# Altium PCB XT long bus (13.3 X 4.2 inches).PCBDOC
Units mil, origin at the board's own origin, x right, y up, seen from the top; angles counter-clockwise.
Board outline 13300 x 4200 mil, 10 copper layers (TopLayer, MidLayer1, MidLayer2, MidLayer3, MidLayer4, MidLayer5, MidLayer6, MidLayer7, MidLayer8, BottomLayer); 1 components, 0 nets, 67 pads, 0 vias.
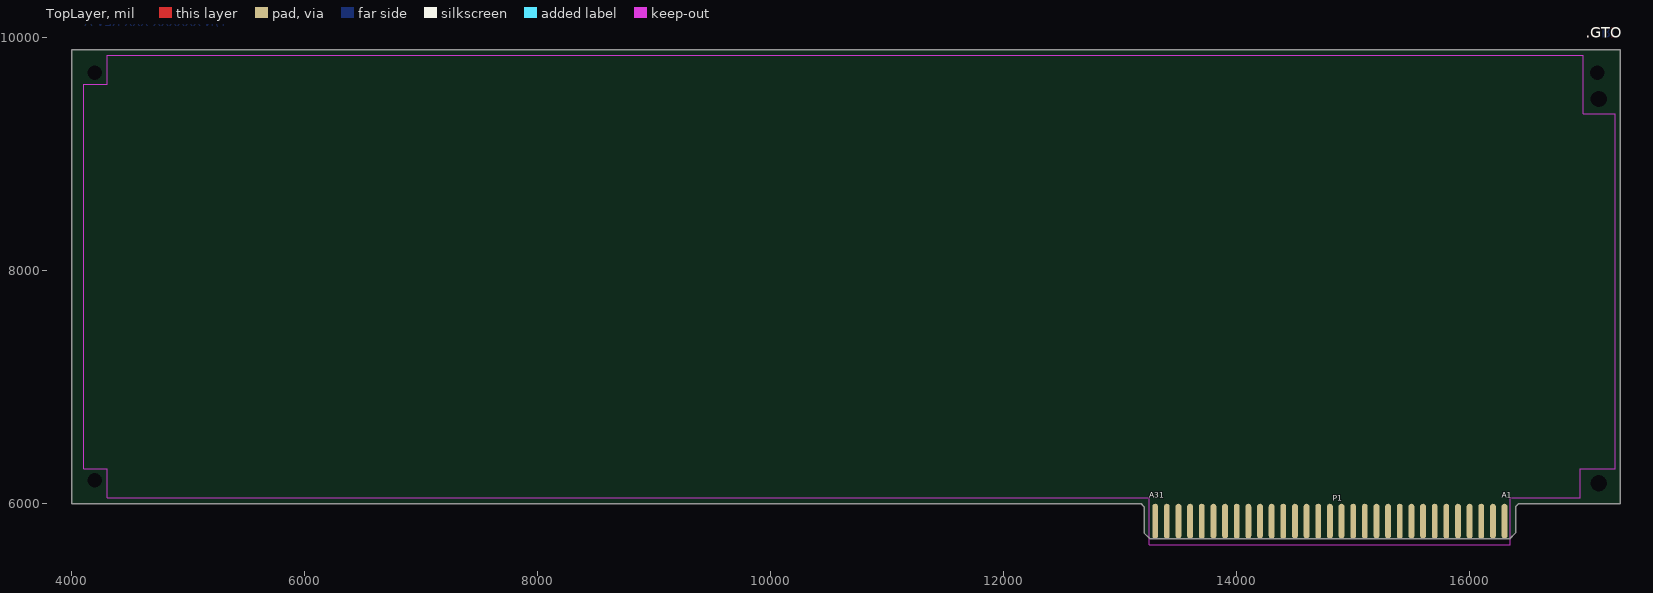
[diagram p0: TopLayer view]
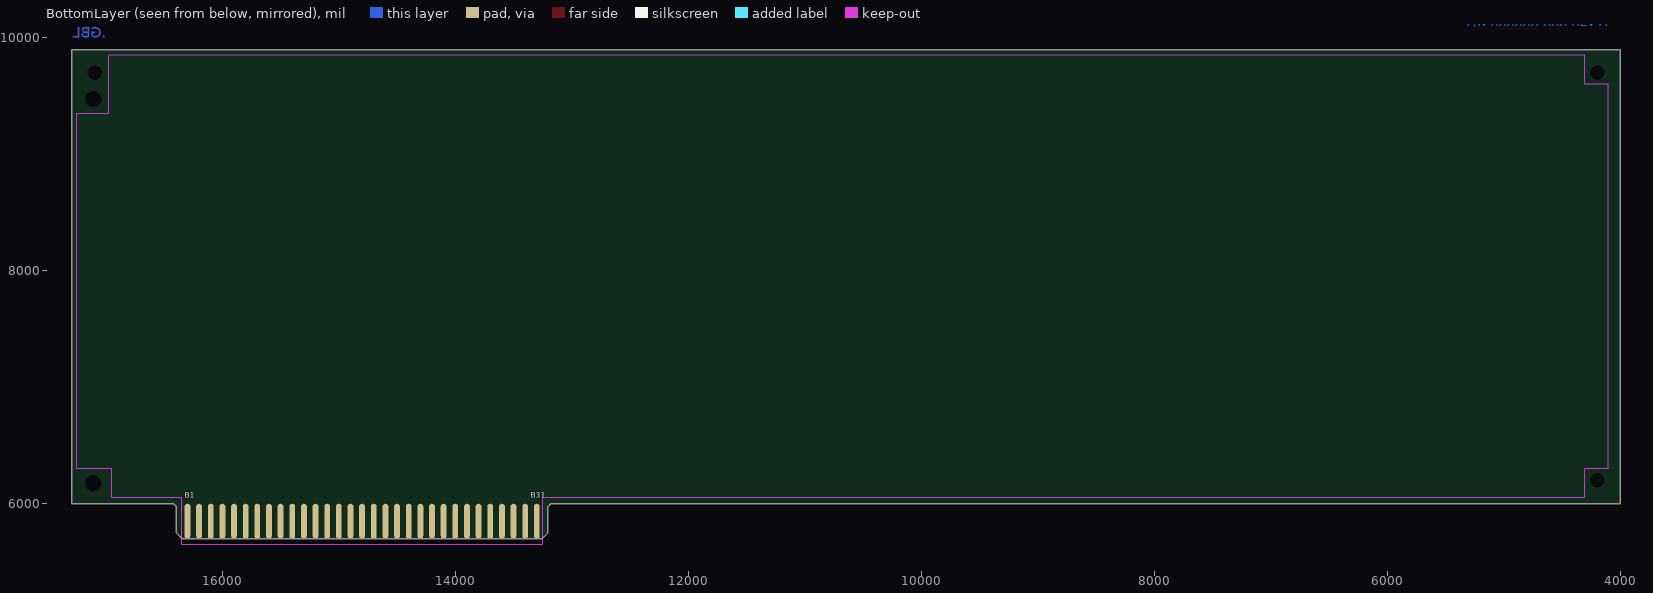
[diagram p1: BottomLayer view, seen from below]
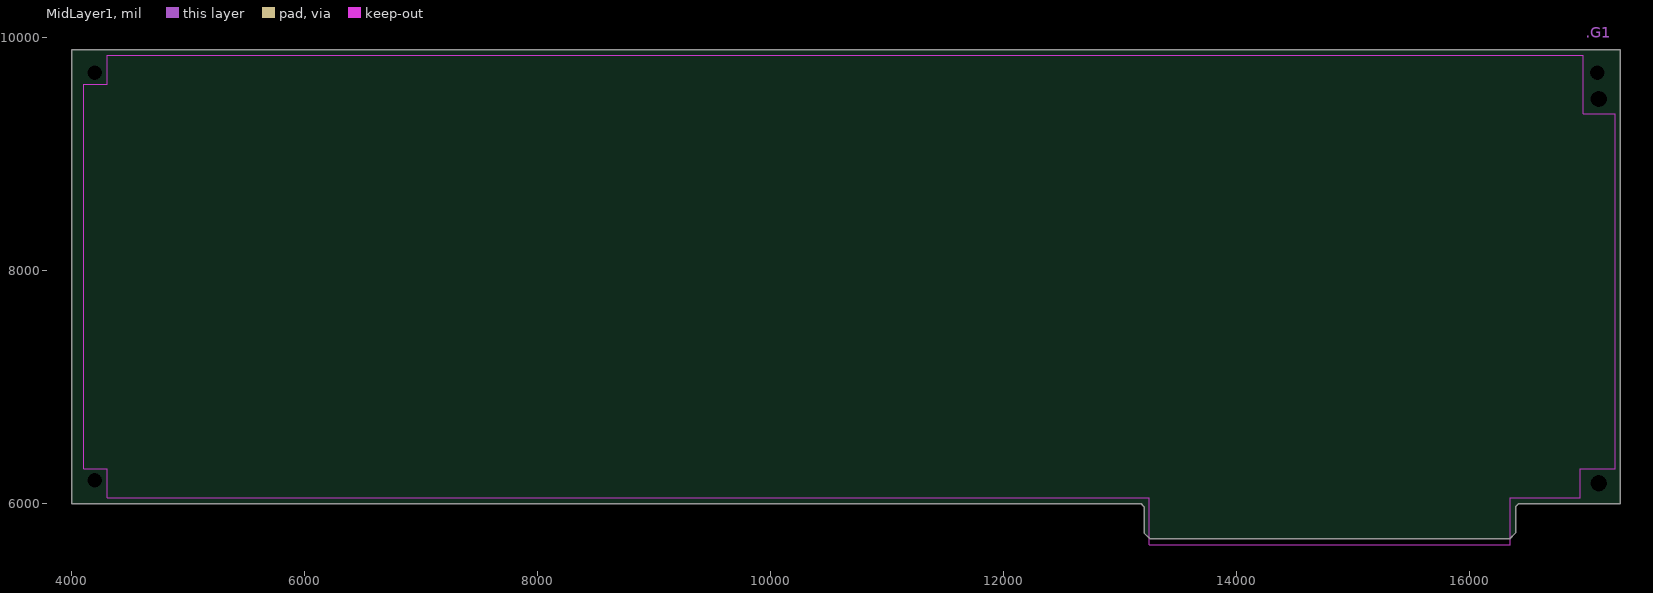
[diagram p2: MidLayer1]
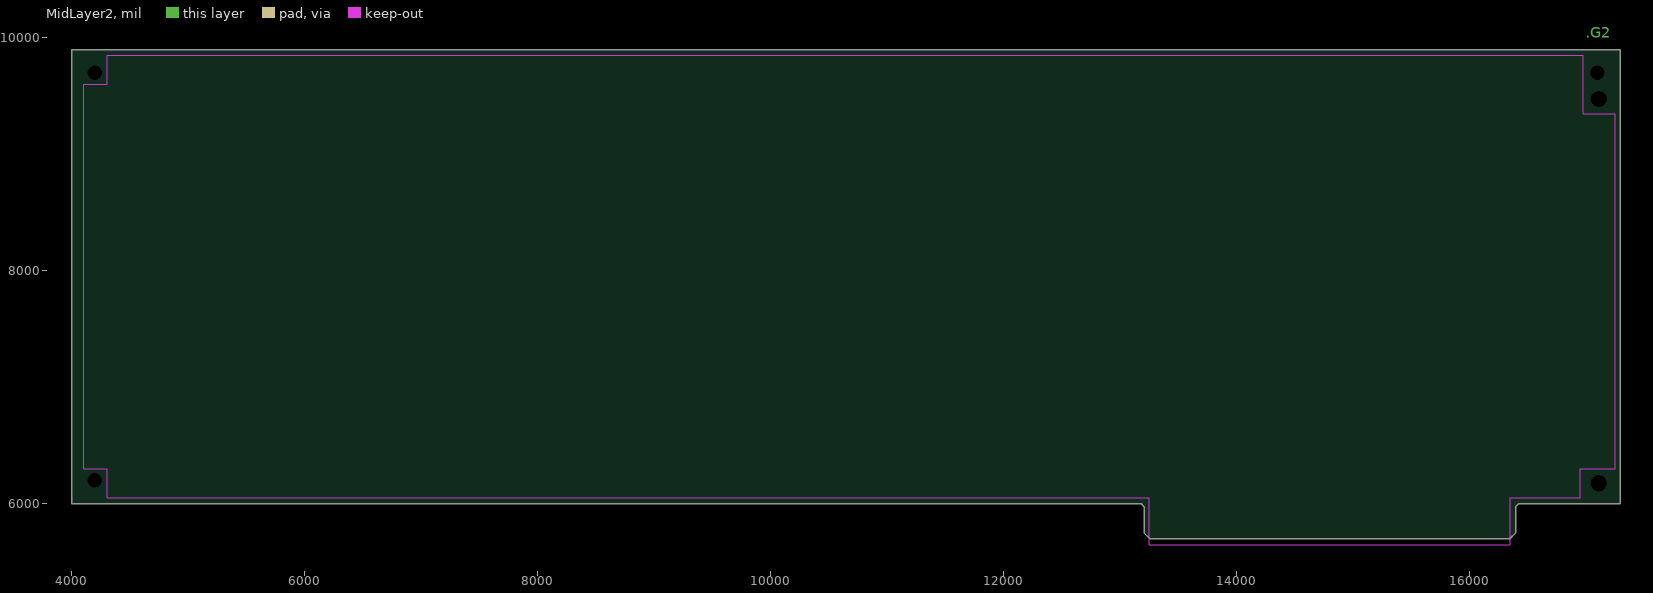
[diagram p3: MidLayer2]
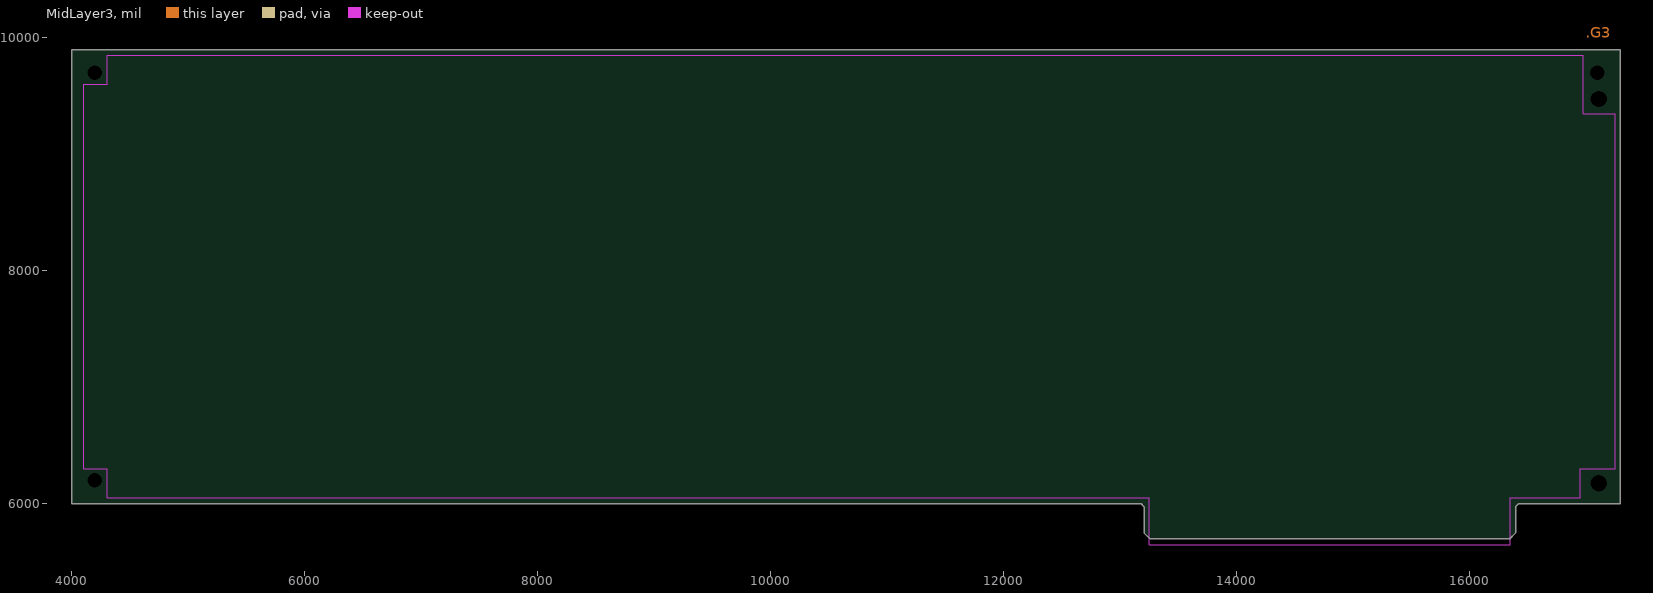
[diagram p4: MidLayer3]
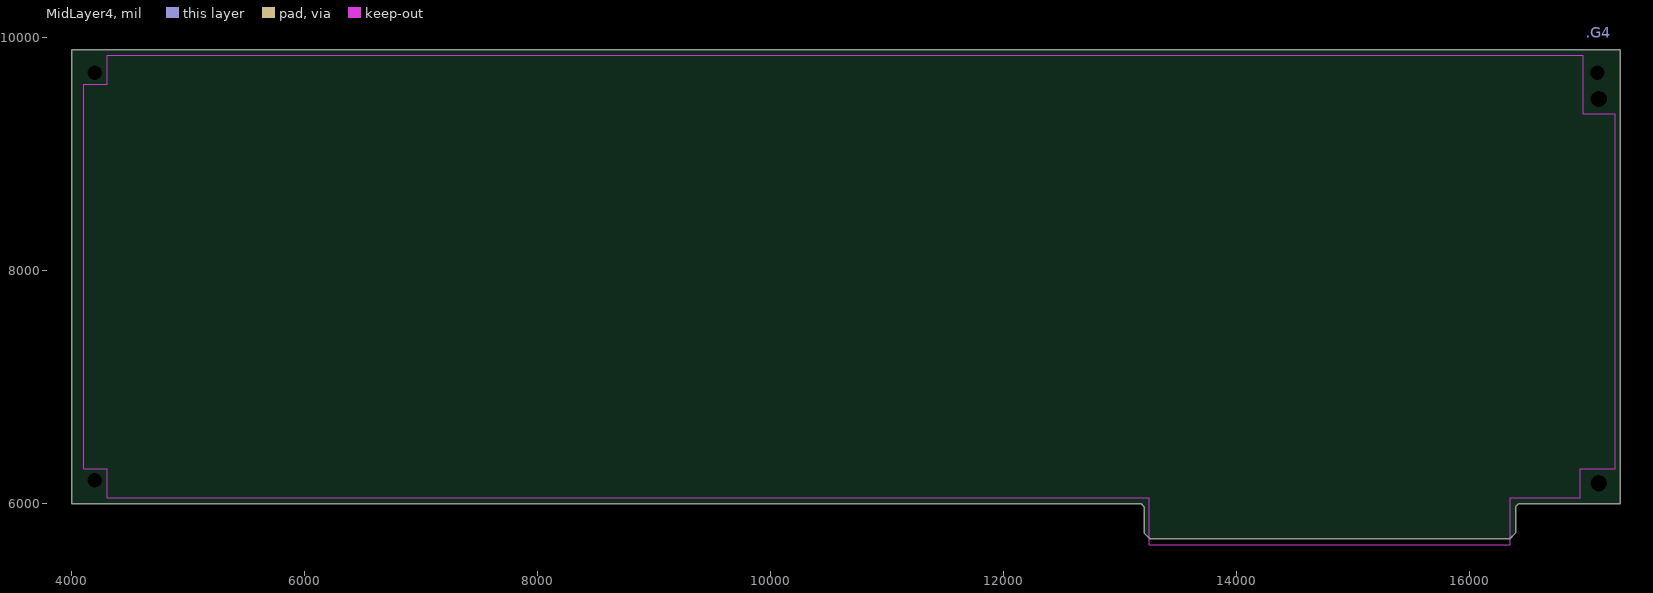
[diagram p5: MidLayer4]
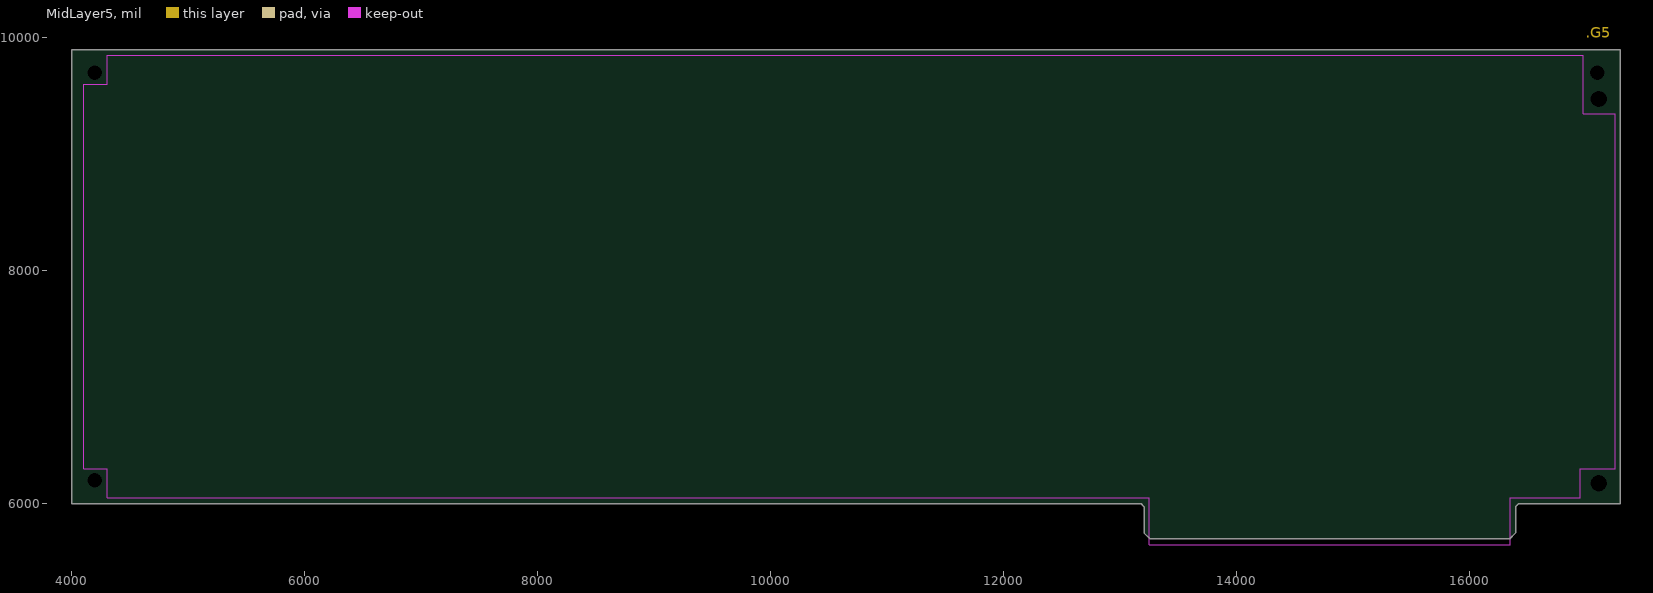
[diagram p6: MidLayer5]
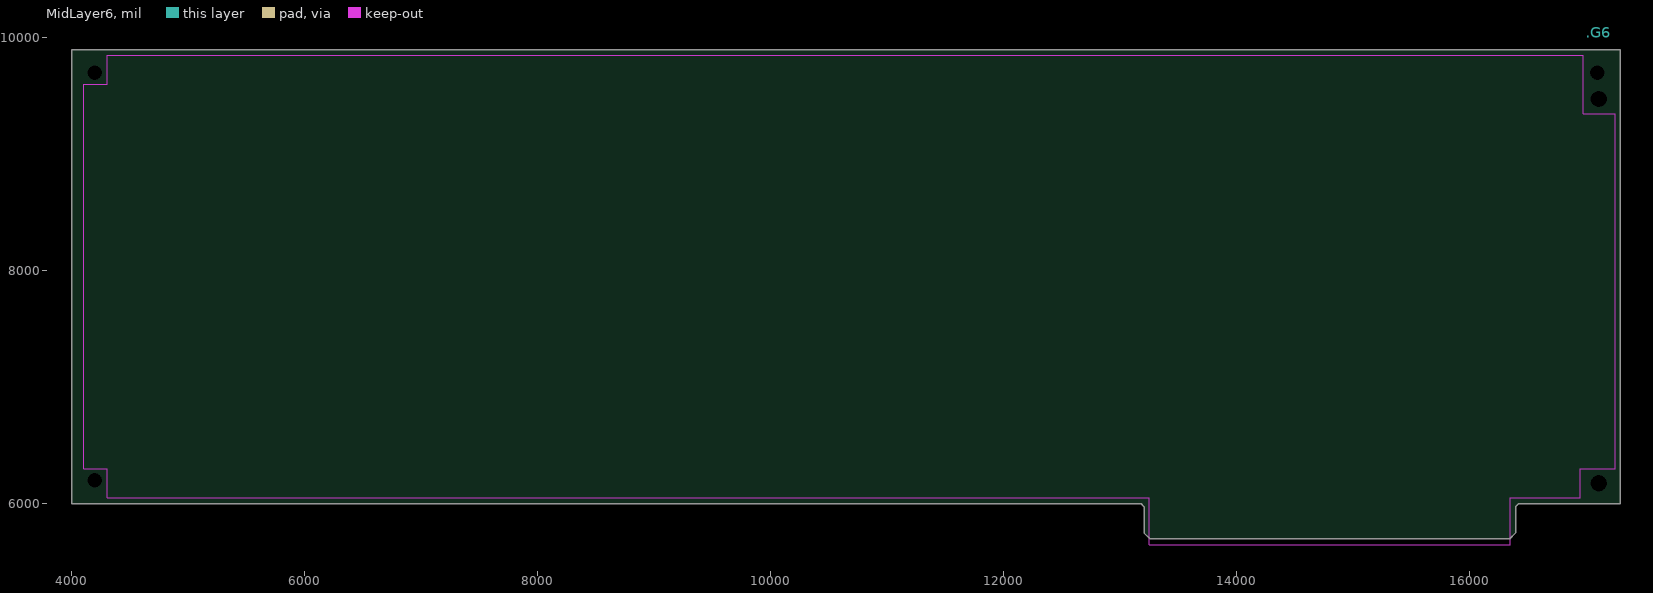
[diagram p7: MidLayer6]
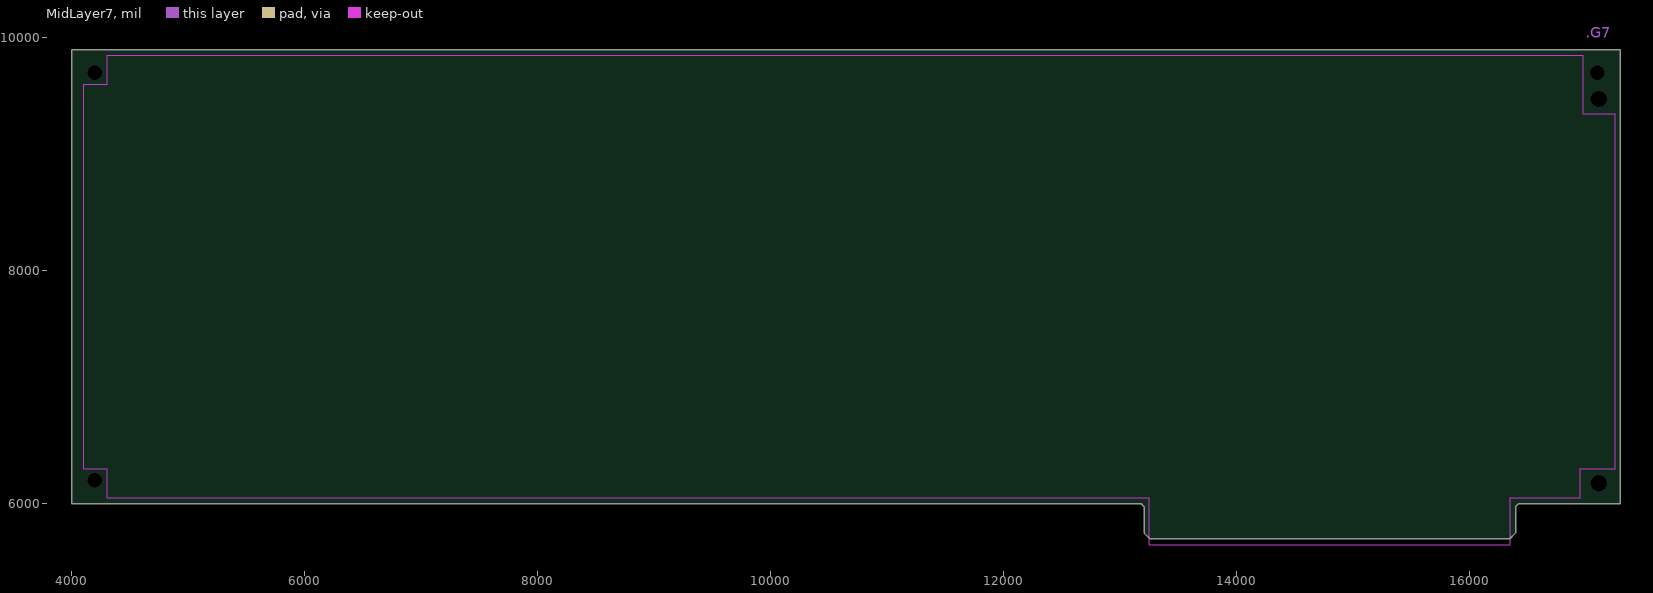
[diagram p8: MidLayer7]
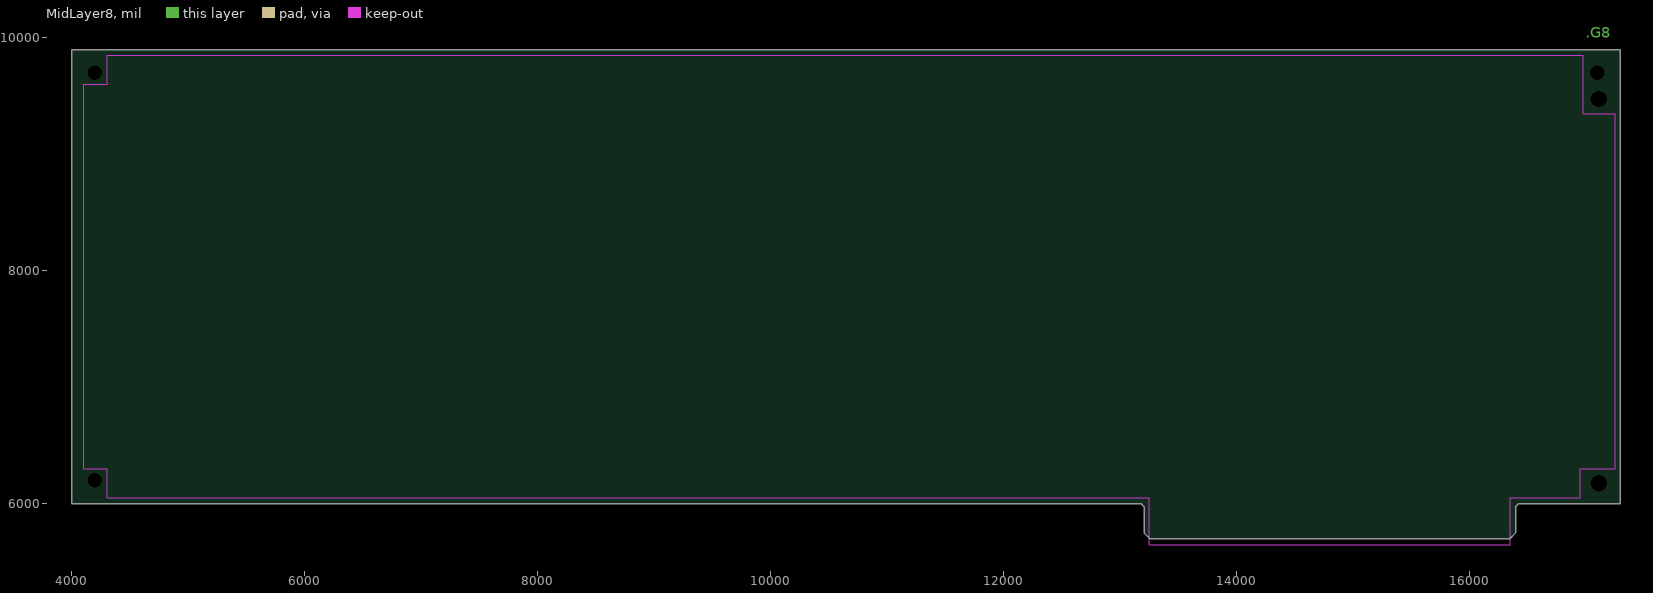
[diagram p9: MidLayer8]

## Layer stack, top to bottom
TopLayer: signal copper 1.4
Dielectric: core 12.6, FR-4, Dk 4.8
MidLayer1: signal copper 1.4
Dielectric: prepreg 12.6, FR-4, Dk 4.8
MidLayer2: signal copper 1.4
Dielectric: core 12.6, FR-4, Dk 4.8
MidLayer3: signal copper 1.4
Dielectric: prepreg 12.6, FR-4, Dk 4.8
MidLayer4: signal copper 1.4
Dielectric: core 12.6, FR-4, Dk 4.8
MidLayer5: signal copper 1.4
Dielectric: prepreg 12.6, FR-4, Dk 4.8
MidLayer6: signal copper 1.4
Dielectric: core 12.6, FR-4, Dk 4.8
MidLayer7: signal copper 1.4
Dielectric: prepreg 12.6, FR-4, Dk 4.8
MidLayer8: signal copper 1.4
Dielectric: core 12.6, FR-4, Dk 4.8
BottomLayer: signal copper 1.4

## Board outline
4000,6000 13185,6000 13210,5975 13210,5750 13260,5700 16350,5700 16400,5750 16400,5975 16425,6000 17300,6000 17300,9900 4000,9900

## Design rules (kind name [scope] priority, off if disabled: settings)
Clearance [All] p1: gap=10
FabricationTestPointUsage TestPointUsage [All] p1: valid=0 allowmultiple=FALSE
FabricationTestpoint Testpoint [All] p1: side=3 testpointundercomponent=TRUE minsize=40 maxsize=100 preferedsize=60 minholesize=20 maxholesize=40 preferedholesize=32 testpointgrid=1 allowsidetop=TRUE allowsidebottom=TRUE usegrid=TRUE gridtolerance=0.01
PasteMaskExpansion PasteMaskExpansion_1 [InComponent('P1')] p1: expansion=-150
PasteMaskExpansion [All] p2: expansion=0
PlaneClearance [All] p1: clearance=10
PolygonConnect [All] p1: connectstyle=Relief reliefconductorwidth=10 reliefentries=4 polygonreliefangle="90 Angle"
RoutingVias [All] p1: holewidth=28 width=50 viastyle="Through Hole" minholewidth=28 minwidth=50 maxholewidth=28 maxwidth=50
SilkscreenOverComponentPads [All] p1: minsilkscreentomaskgap=10
SolderMaskExpansion [All] p1: expansion=2
Width [All] p1: maxlimit=10 minlimit=10 preferedwidth=10
23 further rules are at their usual default settings.

## Components (designator, comment, footprint, x,y, rotation, side; value= is the part's Value field where it differs from the comment)
P1 "ECN-IBMXT" ECN-IBMXT 16305,5850 r0 top locked

## Footprints (in the part's own frame and the unit in brackets; to place one, negate y for a bottom-side part, rotate by r counter-clockwise, add the part's x,y. Pads: shape width x height; smd on the part's side, far side on the other; paste and mask are expansions set on the pad)
ECN-IBMXT [mil]
  oval 50x300 smd: A1(0,0) A2(-100,0) A3(-200,0) A4(-300,0) A5(-400,0) A6(-500,0) A7(-600,0) A8(-700,0) A9(-800,0) A10(-900,0) A11(-1000,0) A12(-1100,0) A13(-1200,0) A14(-1300,0) A15(-1400,0) A16(-1500,0) A17(-1600,0) A18(-1700,0) A19(-1800,0) A20(-1900,0) A21(-2000,0) A22(-2100,0) A23(-2200,0) A24(-2300,0) A25(-2400,0) A26(-2500,0) A27(-2600,0) A28(-2700,0) A29(-2800,0) A30(-2900,0) A31(-3000,0)
  oval 50x300 smd far side: B1(0,0) B2(-100,0) B3(-200,0) B4(-300,0) B5(-400,0) B6(-500,0) B7(-600,0) B8(-700,0) B9(-800,0) B10(-900,0) B11(-1000,0) B12(-1100,0) B13(-1200,0) B14(-1300,0) B15(-1400,0) B16(-1500,0) B17(-1600,0) B18(-1700,0) B19(-1800,0) B20(-1900,0) B21(-2000,0) B22(-2100,0) B23(-2200,0) B24(-2300,0) B25(-2400,0) B26(-2500,0) B27(-2600,0) B28(-2700,0) B29(-2800,0) B30(-2900,0) B31(-3000,0)

## Free pads (board coordinates)
  round 50 hole 140: 1(17115,9475) 2(17115,6175)
  round 50 hole 125: 3(17100,9700) 4(4200,9700) 5(4200,6200)

## Nets (pads, with @x,y where several pads share a name; then routed paths per layer and width w, separated by ;. In a path a pad name is that pad's centre, name@x,y a point inside that pad or via, vN(x,y) a via of type N, cw(c..) or ccw(c..) an arc to the next point about the centre after c; other vN are vias at no path point)
pads on no net: P1.A1 P1.A2 P1.A3 P1.A4 P1.A5 P1.A6 P1.A7 P1.A8 P1.A9 P1.A10 P1.A11 P1.A12 P1.A13 P1.A14 P1.A15 P1.A16 P1.A17 P1.A18 P1.A19 P1.A20 P1.A21 P1.A22 P1.A23 P1.A24 P1.A25 P1.A26 P1.A27 P1.A28 P1.A29 P1.A30 P1.A31 P1.B1 P1.B2 P1.B3 P1.B4 P1.B5 P1.B6 P1.B7 P1.B8 P1.B9 P1.B10 P1.B11 P1.B12 P1.B13 P1.B14 P1.B15 P1.B16 P1.B17 P1.B18 P1.B19 P1.B20 P1.B21 P1.B22 P1.B23 P1.B24 P1.B25 P1.B26 P1.B27 P1.B28 P1.B29 P1.B30 P1.B31

## Keep-outs
KeepOutLayer:
  lines w8: 4105,6300 4305,6300 4305,6050 13255,6050 13255,5650 16355,5650 16355,6050 16955,6050 16955,6300 17255,6300 17255,9350 16980,9350 16980,9850 4305,9850 4305,9600 4105,9600 4105,6300

## Other copper
TopLayer:
  text ".GTL" at 17000,10000 h90
MidLayer1:
  text ".G1" at 17000,10000 h90
MidLayer2:
  text ".G2" at 17000,10000 h90
MidLayer3:
  text ".G3" at 17000,10000 h90
MidLayer4:
  text ".G4" at 17000,10000 h90
MidLayer5:
  text ".G5" at 17000,10000 h90
MidLayer6:
  text ".G6" at 17000,10000 h90
MidLayer7:
  text ".G7" at 17000,10000 h90
MidLayer8:
  text ".G8" at 17000,10000 h90
BottomLayer:
  text "P/N XXXXXX-XXX REV A" at 5320,10100 h75
  text ".GBL" at 17000,10000 h90

## Silkscreen, mask and mechanical layers (free items; w line width, h text height)
TopOverlay:
  rectangle: 4281,10303 5031,10503
  rectangle: 4281,10593 5031,10793
  lines w10: 5392.59,10695.97 ccw(c5441,10735.5) 5392.71,10695.83
  text "C" at 5496,10698 h60
  text "2002 COMPANY NAME" at 5646,10698 h75
  text "S/N" at 4031,10650.5 h75
  text "BOARD NAME" at 5496,10523 h75
  text "ASSY NO.: XXXXXX" at 5496,10373 h75
  text "REV" at 4031,10353 h75
  text ".GTO" at 17000,10000 h90
TopPaste:
  text ".GTP" at 17000,10000 h90
BottomPaste:
  text ".GBP" at 17000,10000 h90
TopSolder:
  rectangle: 13180,5650 16430,6025
  text ".GTS" at 17000,10000 h90
BottomSolder:
  rectangle: 13180,5650 16430,6025
  text ".GBS" at 17000,10000 h90
Mechanical1:
  the board outline again, w20
Mechanical3:
  lines w10: 16990,6125 16990,6075 17040,6075 ; 16990,6150 16990,6200 ; 16990,6225 16990,6275 17040,6275 ; 16990,9425 16990,9375 17040,9375 ; 16990,9450 16990,9500 ; 16990,9525 16990,9575 17040,9575 ; 17065,6075 17115,6075 ; 17065,6275 17115,6275 ; 17065,9375 17115,9375 ; 17065,9575 17115,9575 ; 17140,6075 17190,6075 ; 17140,6275 17190,6275 ; 17140,9375 17190,9375 ; 17140,9575 17190,9575 ; 17215,6075 17265,6075 ; 17215,6275 17265,6275 ; 17215,9375 17265,9375 ; 17215,9575 17265,9575 ; 17300,6075 17340,6075 17340,4925 17365,4925 17365,9650 17790,9650 17790,9675 17340,9675 17340,9575 17300,9575 ; 17300,6275 17340,6275 17340,9375 17300,9375
Mechanical4:
  circle w10: c13245.67,5719.32 r100
  lines w10: 17970,8115 18045,8040 18120,8115 18195,8040 18270,8115 18345,8040 18420,8115 ; 18451.25,7033.75 18695,6790 18895,6790 ; 19595,8240 20320,8240 ; 20945,6790 20695,6790 20988.75,7083.75 ; 21895,6990 21895,7390 22095,7490 21695,7590 21895,7690 21895,8090 ; 13103.67,5666.32 13123.67,5671.32 13103.67,5721.32 13103.67,5666.32 ; 13103.87,5721.16 13125.36,5771.79 13105,5775 13103.87,5721.16 ; 18345,7140 18432.5,7015 18470,7052.5 18345,7140 ; 20970,7102.5 21007.5,7065 21095,7190 20970,7102.5
  lines w20: 17995,8090 17995,7190 18095,7090 18295,7090 18395,7190 18395,8090 ; 20995,8090 20995,7290 21195,7090 21895,7090
  text ".Pcb_File_Name_No_Path" at 15100,10190 h90
  text ".Printout_Name" at 15100,10000 h90
  text "DETAIL A" at 19595,8290 h120
  text "o" at 19620,6815 h60
  text "o" at 21670,6815 h60
  text ".020 X 45  CHAMFER" at 18970,6740 h90
  text "0.05 X 45  CHAMFER" at 21020,6740 h90
  text "BOTH SIDES" at 18970,6565 h90
  text "TYP 4 PLCS" at 21020,6565 h90
  text "ENTIRE LENGTH OF" at 18970,6390 h90
  text "EDGE CONNECTOR" at 18970,6215 h90
  text "SEE DETAIL A" at 12330,5675 h75
DrillDrawing:
  text ".LEGEND" at 17950,8640 h90
  text "Drilling Details." at 17950,8490 h90

## Dimensions
4200,5980 to 4000,6000 on Mechanical4
3980,6195 to 4000,6000 on Mechanical4
16420,5700 to 16425,6000 on Mechanical4

## Text inside footprints (layer, text, board x,y; h text height)
P1: TopOverlay "A31" at 13255,6050 h48; TopOverlay "A1" at 16280,6050 h48; BottomOverlay "B1" at 16330,6050 h48; BottomOverlay "B31" at 13355,6050 h48